# Altium PCB JHZ-E01S-HW-Sensor-X2-S0.1-磁编码器AS5047-20160919.PcbDoc
Units mil, origin at the board's own origin, x right, y up, seen from the top; angles counter-clockwise.
Board outline 787.4 x 787.4 mil, 2 copper layers (Top Layer, Bottom Layer); 7 components, 9 nets, 29 pads, 22 vias.
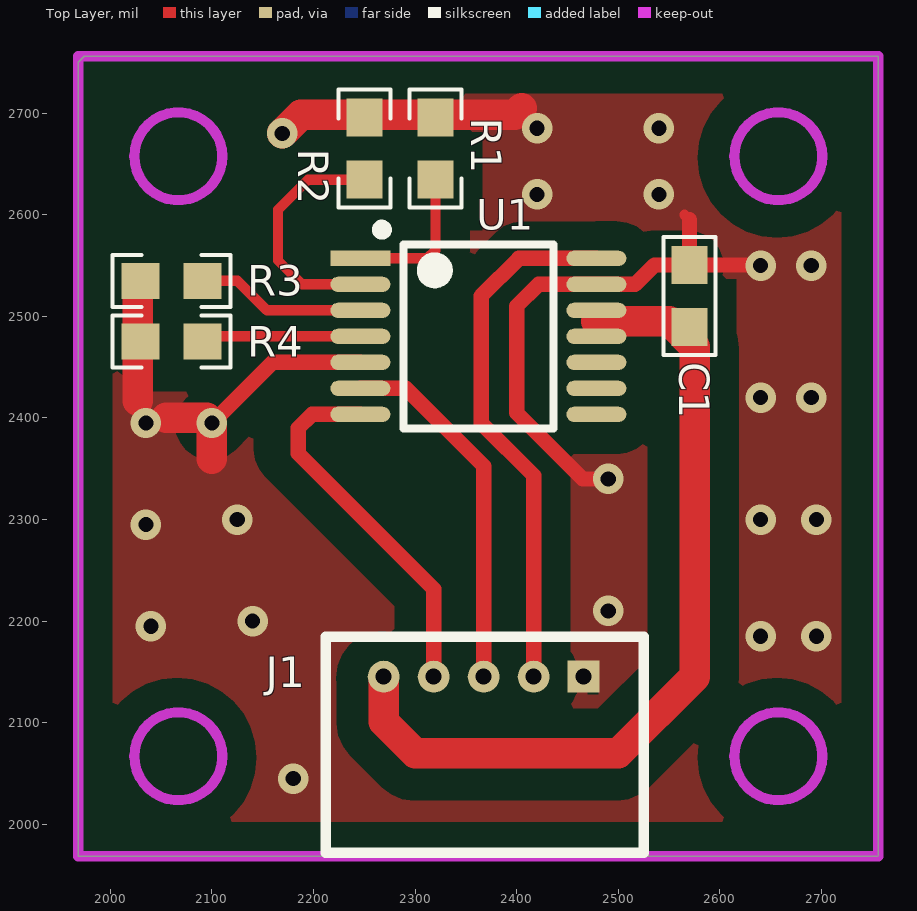
[diagram p0: Top Layer view]
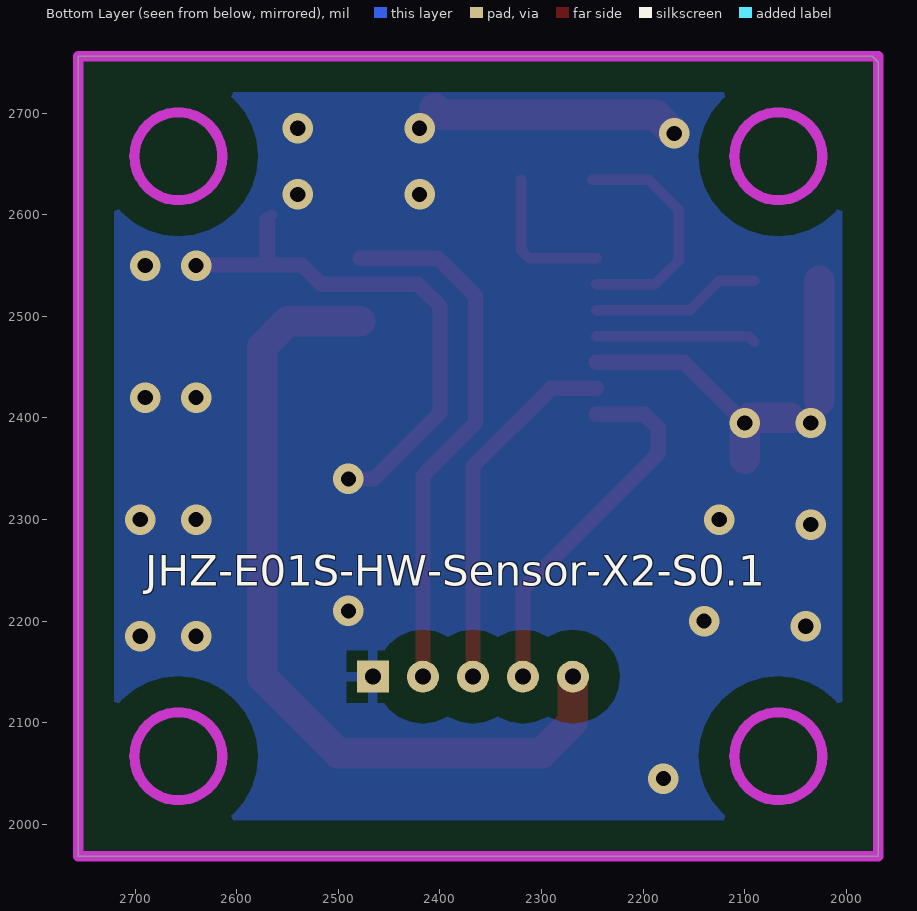
[diagram p1: Bottom Layer view, seen from below]

## Layer stack, top to bottom
Top Layer: signal copper 1.4
Dielectric: dielectric 12.6, FR-4, Dk 4.8
Bottom Layer: signal copper 1.4

## Board outline
1968.5,1968.5 2755.91,1968.5 2755.91,2755.91 1974.41,2755.91 1968.5,2750

## Design rules (kind name [scope] priority, off if disabled: settings)
Clearance [All] p1: gap=5
MinimumSolderMaskSliver [All] p1: minsoldermaskwidth=1
PolygonConnect [IsVia] p1: connectstyle=Direct reliefconductorwidth=10 reliefentries=4 polygonreliefangle="90 Angle" airgapwidth=10
RoutingVias [All] p1: holewidth=28 width=50 viastyle="Through Hole" minholewidth=10 minwidth=30 maxholewidth=28 maxwidth=50
SilkToSilkClearance [All] p1: silktosilkclearance=1
SilkToSolderMaskClearance [IsPad] p1: minsilkscreentomaskgap=1 clearancetoexposedcopper=TRUE
SolderMaskExpansion [All] p1: expansion=4
Width [All] p1: maxlimit=100 minlimit=10 preferedwidth=10 minimp=50.000000 maximp=50.000000 favimp=50.000000
25 further rules are at their usual default settings.

## Components (designator, comment, footprint, x,y, rotation, side; value= is the part's Value field where it differs from the comment)
C1 "MCC0603" C0603_M1608 2570,2520 r90 top
J1 "AT-1.25-AW-5P" AT-1.25-AW-5P 2525,2165 r180 top
R1 "R0603_M1608" R0603_M1608 2320,2665 r270 top
R2 "R0603_M1608" R0603_M1608 2250,2665 r270 top
R3 "R0603_M1608" R0603_M1608 2060,2535 r0 top
R4 "R0603_M1608" R0603_M1608 2060,2475 r0 top
U1 "AS5047" TSSOP14_065P 2362.2,2480.32 r0 top locked

## Footprints (in the part's own frame and the unit in brackets; to place one, negate y for a bottom-side part, rotate by r counter-clockwise, add the part's x,y. Pads: shape width x height; smd on the part's side, far side on the other; paste and mask are expansions set on the pad)
AT-1.25-AW-5P [mm]
  rect 0.8x0.8 hole 0.4: 1(1.5,0.5)
  round 0.8 hole 0.4: 2(2.75,0.5) 3(4,0.5) 4(5.25,0.5) 5(6.5,0.5)
  silkscreen extent 0,-0.5 7.95,4.9
C0603_M1608 [mm] "Chip Capacitor, 2-Leads, Body 1.6x0.8mm, IPC Medium Density"
  rect 0.95x0.9 smd: 1(-0.775,0) 2(0.775,0)
  silkscreen extent -1.48,-0.65 1.48,0.65
R0603_M1608 [mm]
  rect 0.95x0.9 smd: 1(-0.775,0) 2(0.775,0)
  silkscreen extent -1.48,-0.65 1.48,0.65
TSSOP14_065P [mm]
  rect 1.5x0.38 smd: 1(-2.95,1.95)
  oval 1.5x0.38 smd: 2(-2.95,1.3) 3(-2.95,0.65) 4(-2.95,0) 5(-2.95,-0.65) 6(-2.95,-1.3) 7(-2.95,-1.95) 8(2.95,-1.95) 9(2.95,-1.3) 10(2.95,-0.65) 11(2.95,0) 12(2.95,0.65) 13(2.95,1.3) 14(2.95,1.95)
  silkscreen extent -2.54,-2.3 1.88,2.79

## Part data
C1: "Multilayer Ceramic Capacitor 0603"
J1: library part 1.25T-1-A-5P, "Header, 1.25mm,5-Pin"
R1 R2 R3 R4: "Resistor"

## Via types
v1: diameter 30, hole 15, Top Layer to Bottom Layer, 22 vias

## Nets (pads, with @x,y where several pads share a name; then routed paths per layer and width w, separated by ;. In a path a pad name is that pad's centre, name@x,y a point inside that pad or via, vN(x,y) a via of type N, cw(c..) or ccw(c..) an arc to the next point about the centre after c; other vN are vias at no path point)
3.3V: C1.1 J1.5 U1.11 U1.12 | length 826.2
  Top Layer w30: J1.5 2269.09,2100.91 2300,2070 2500,2070 2575,2145 2575,2470 2550,2495 2478.35,2495
A: J1.4 U1.7 | length 366.6
  Top Layer w15: U1.7 2198.54,2403.54 2185,2390 2185,2365 2318.31,2231.69 J1.4
B: J1.3 U1.6 | length 360.4
  Top Layer w15: U1.6 2290.87,2429.13 2367.52,2352.48 J1.3
GND: C1.2 J1.1 R1.1 R2.1 R3.1 R4.1 U1.5 U1.13 | length 1277.2
  Top Layer w10: R4.1 R3.1 ; R2.1 R1.1 ; 2565,2600 2570,2595
  Top Layer w15: v1(2100,2395) 2159.72,2454.72 U1.5 ; v1(2490,2340) 2465,2340 2400,2405 2400,2510 2421.5,2531.5 U1.13 2516.5,2531.5 2535.51,2550.51 C1.2 ; 2570,2595 C1.2 ; v1@2639.49,2550.51 C1.2
  Top Layer w30: 2026.81,2416.81 R3.1@2026.81,2535 ; 2055,2400 2095,2400 v1(2100,2395) 2100,2359.7 ; v1(2169.29,2680) 2187.48,2698.19 2398.19,2698.19 2405,2705
  other v1: 2180,2045 2640,2185 2695,2185 2040,2195 2140,2200 2490,2210 2035,2295 2125,2300 2640,2300 2695,2300 2035,2395 2640,2420 2690,2420 2640,2550 2690,2550 2420,2620 2540,2620 2420,2685 2540,2685
NetR1_2: R1.2 U1.1 | length 146.7
  Top Layer w10: U1.1 2312.09,2557.09 2320,2565 R1.2
NetR2_2: R2.2 U1.2 | length 238
  Top Layer w10: U1.2 2188.5,2531.5 2165,2555 2165,2605 2194.49,2634.49 R2.2
NetR3_2: R3.2 U1.3 | length 167.6
  Top Layer w10: R3.2 2125,2535 2154.09,2505.91 U1.3
NetR4_2: R4.2 U1.4 | length 157.8
  Top Layer w10: R4.2 2095.83,2480.32 U1.4
Z: J1.2 U1.14 | length 524.8
  Top Layer w15: J1.2 2416.73,2343.27 2365,2395 2365,2520 2402.09,2557.09 U1.14
pads on no net: U1.8 U1.9 U1.10

## Polygon pours and split planes (outlines as drawn)
GND on Top Layer "Top Layer-No Net 1" (solid, remove dead copper, pour order 2): 1967.24,2754.57 2754.65,2754.57 2754.65,1967.17 1967.24,1967.17
GND on Bottom Layer "Top Layer-No Net 1" (solid, pour order 4): 1968.5,1968.5 1968.5,2755.91 2755.91,2755.91 2755.91,1968.5

## Keep-outs
Keep-Out Layer:
  circle w10: c2657.48,2657.48 r43.31
  circle w10: c2657.48,2066.93 r43.31
  circle w10: c2066.93,2066.93 r43.31
  circle w10: c2066.93,2657.48 r43.31
  lines w10: 1968.5,1968.5 2755.91,1968.5 2755.91,2755.91 1968.5,2755.91 1968.5,1968.5

## Silkscreen, mask and mechanical layers (free items; w line width, h text height)
Bottom Overlay:
  text "JHZ-E01S-HW-Sensor-X2-S0.1" at 2690,2235 h30